# Altium PCB Unknown WaterSensor.PcbDoc
Units mm, origin at the board's own origin, x right, y up, seen from the top; angles counter-clockwise.
Board outline 56.1 x 56.1 mm, 2 copper layers (Top Layer, Bottom Layer), stack 1.071 mm thick; 44 components, 33 nets, 146 pads, 184 vias.
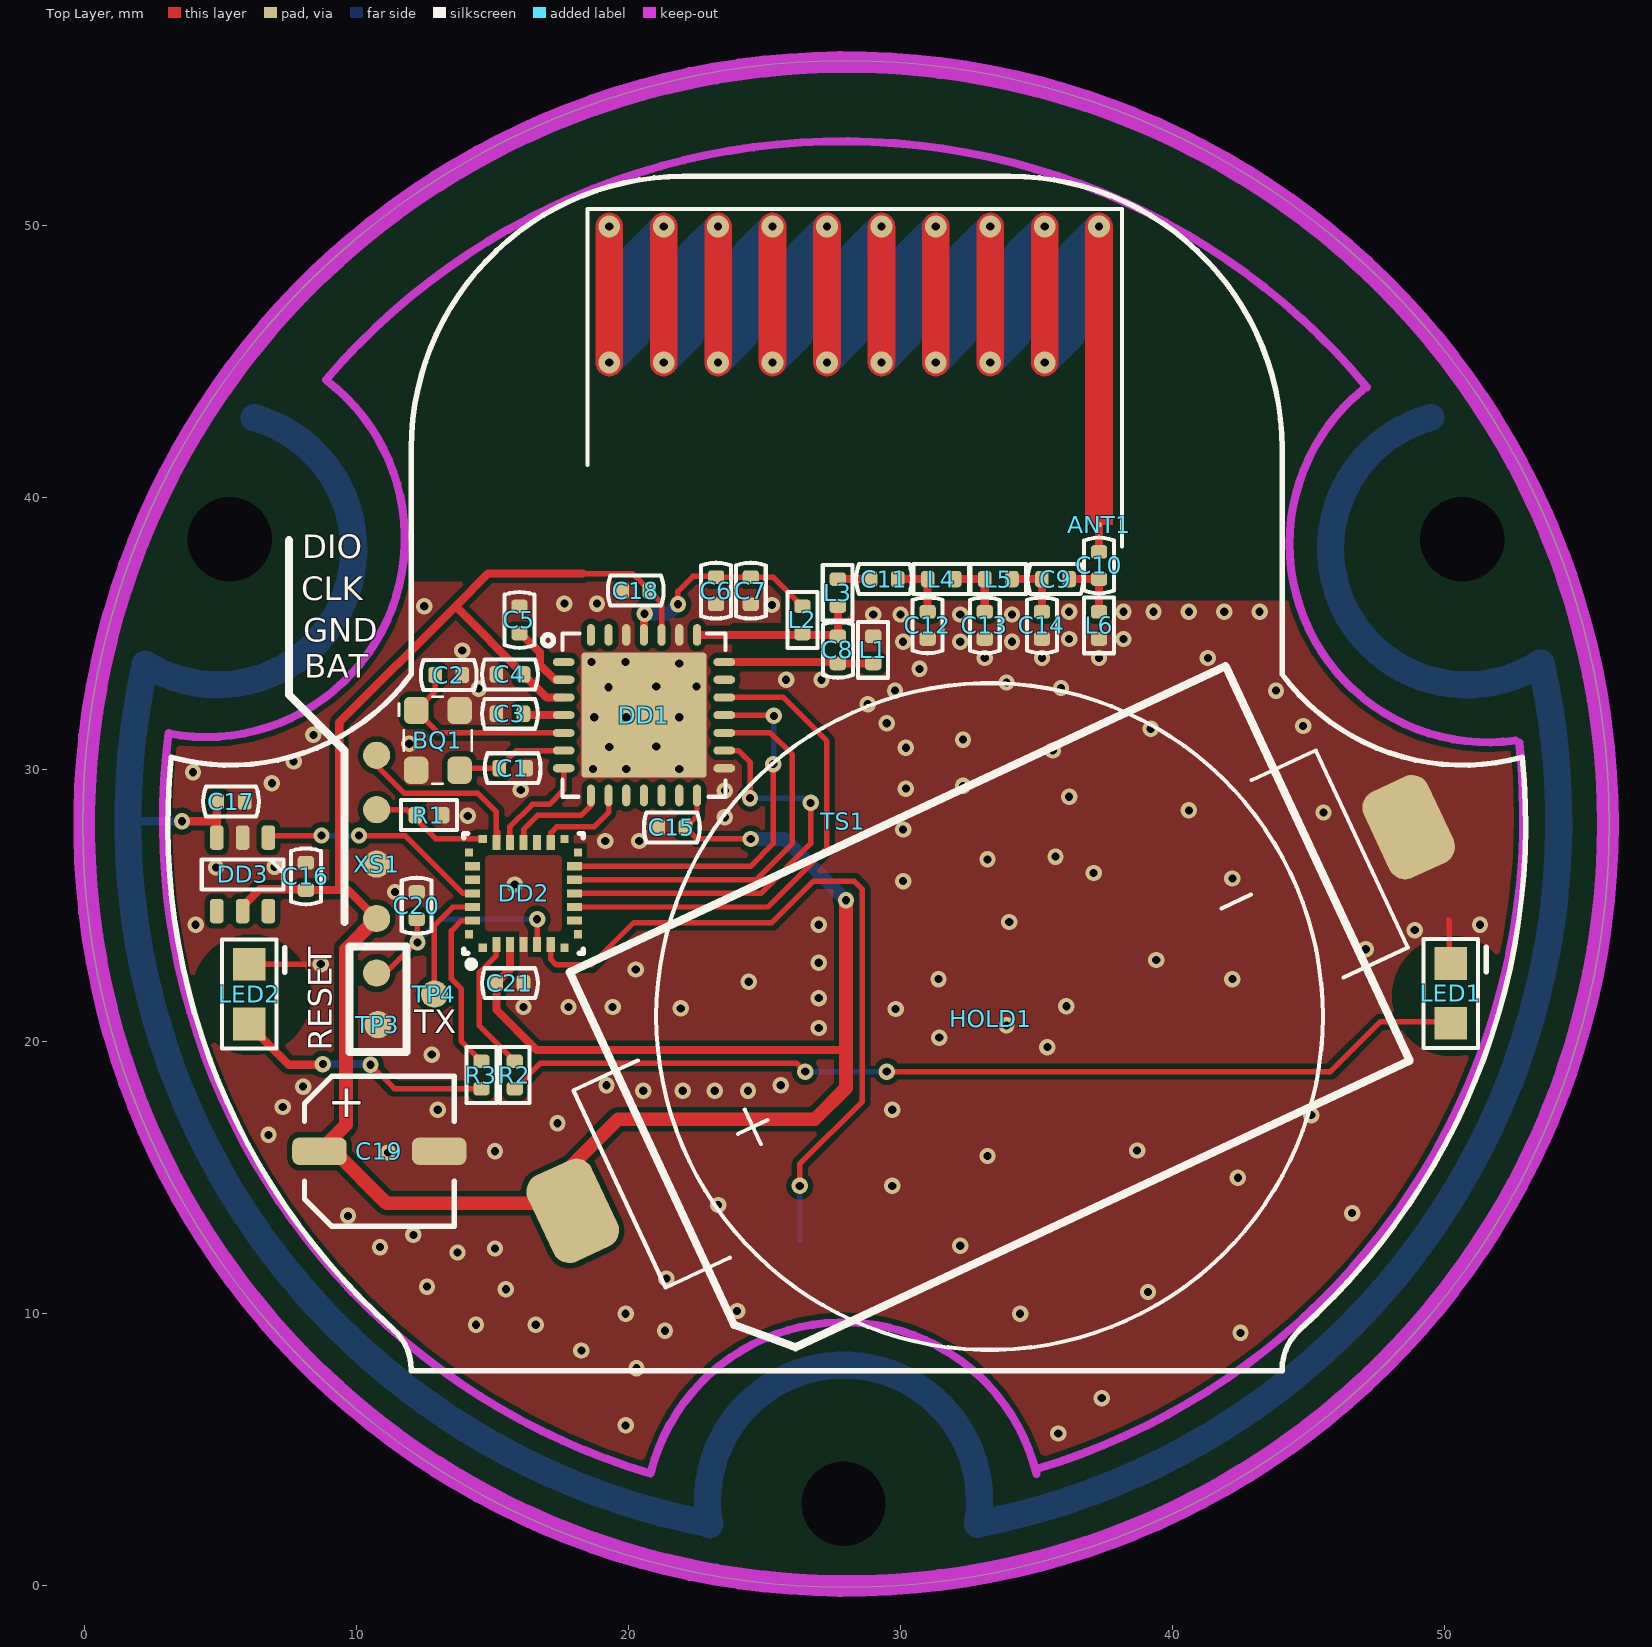
[diagram p0: Top Layer view]
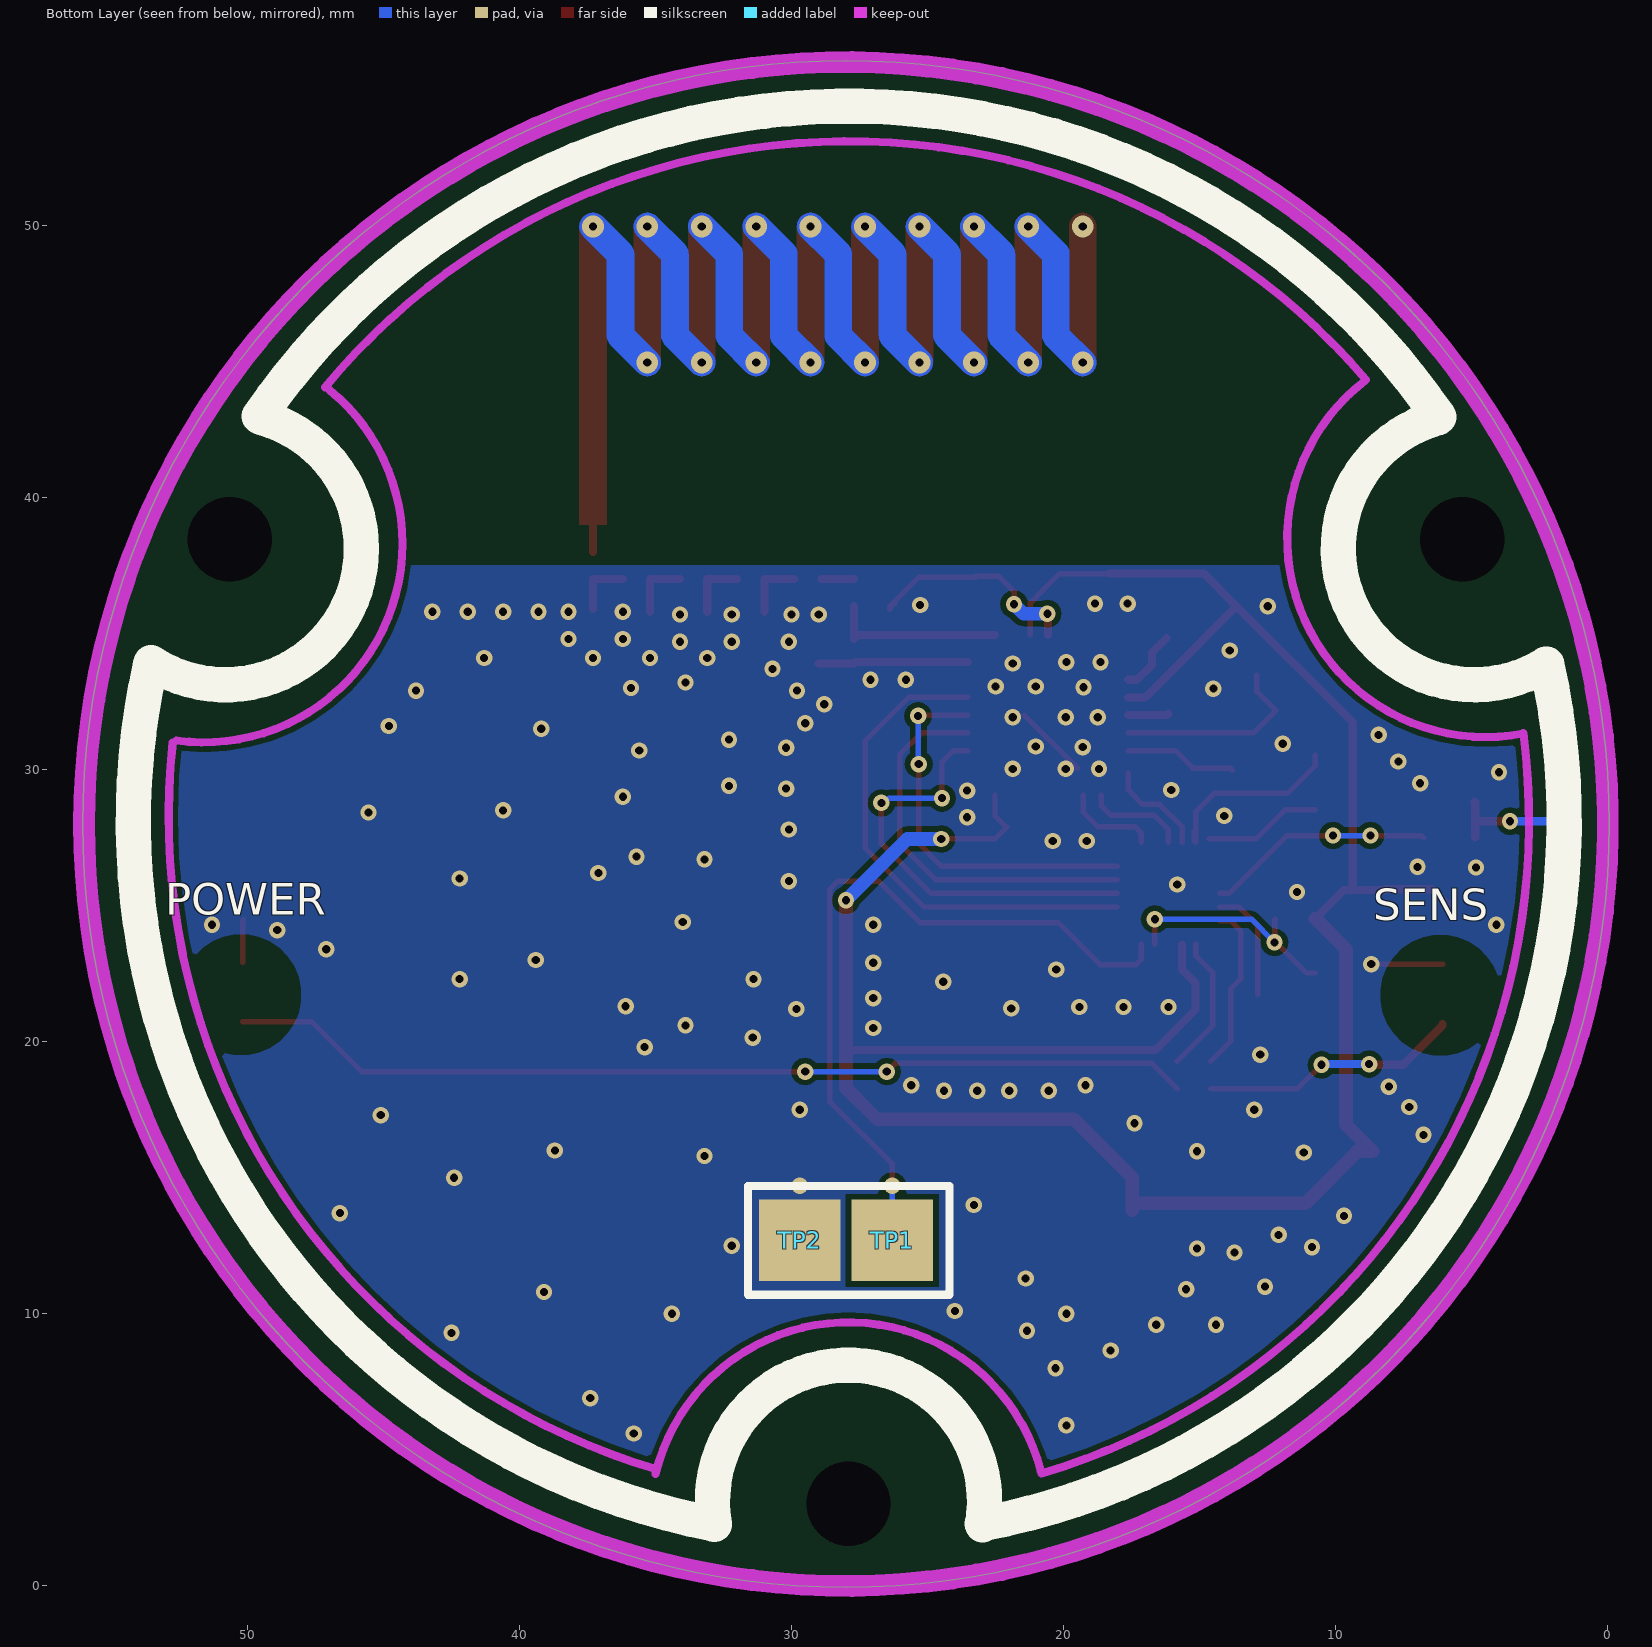
[diagram p1: Bottom Layer view, seen from below]
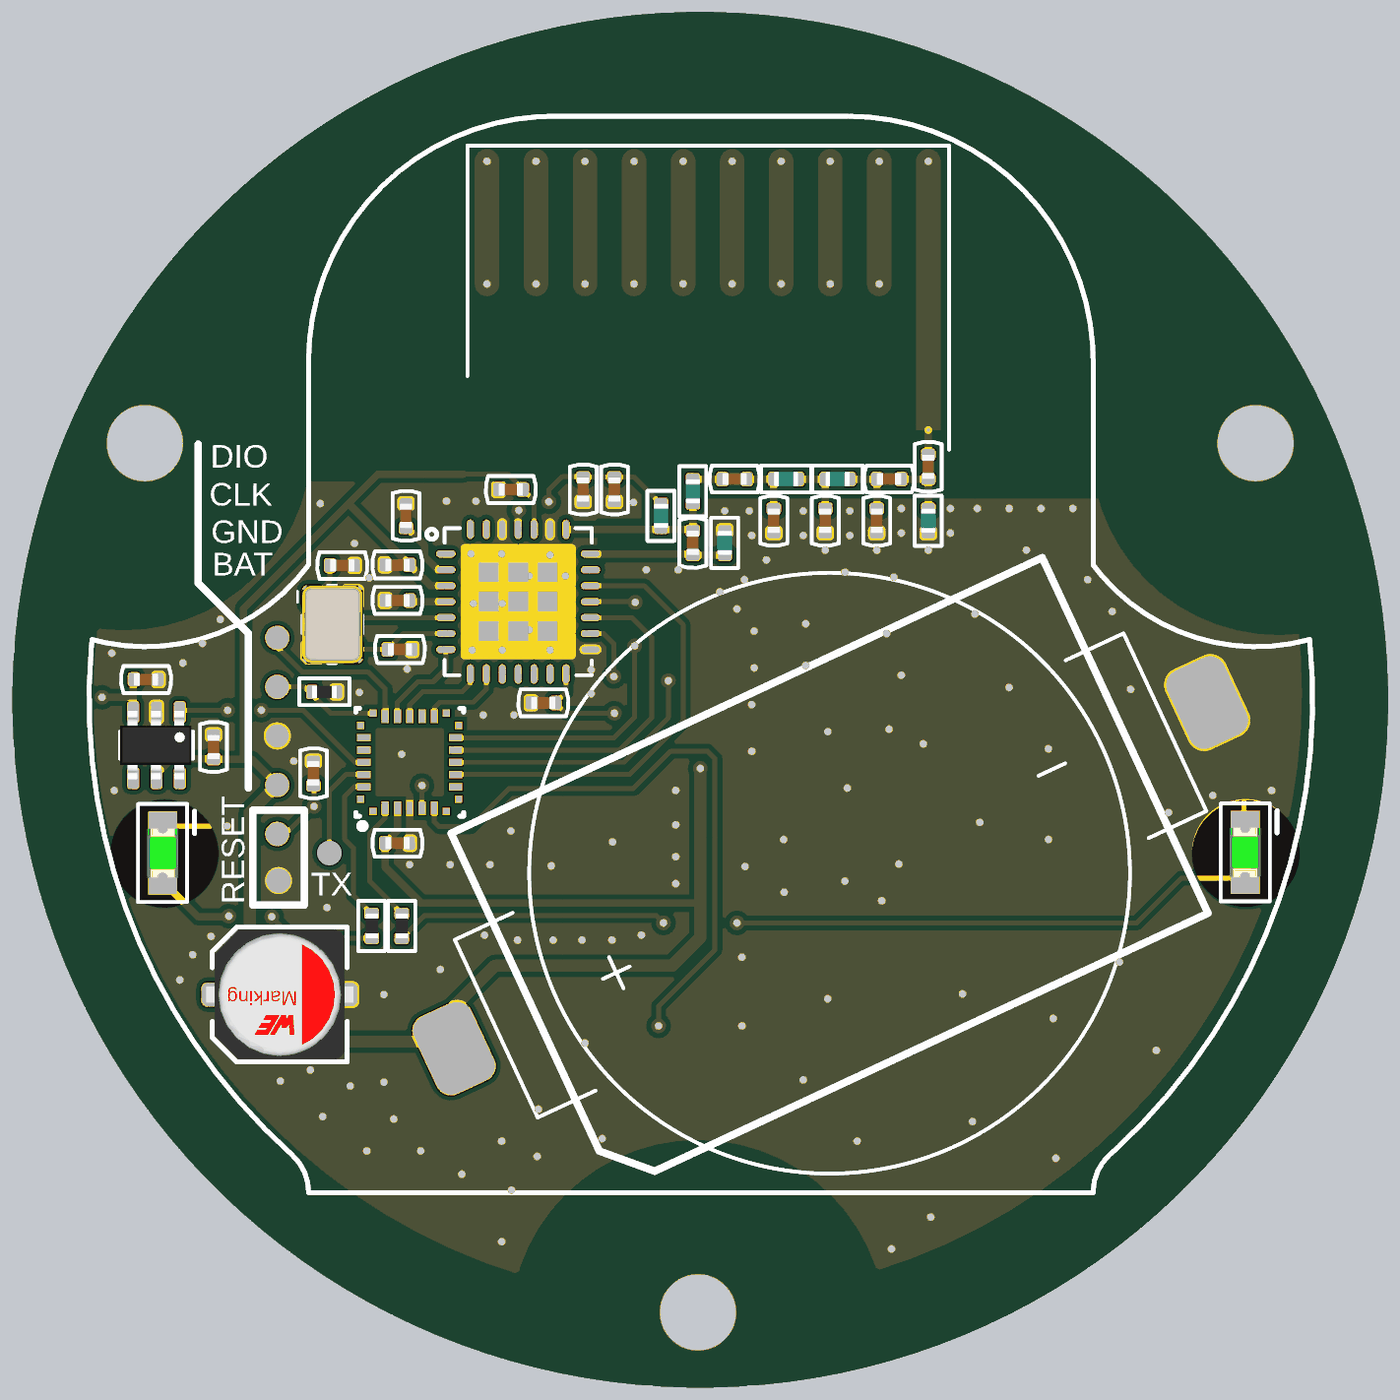
[diagram p2: 3D render of the assembled board from above, using the file's embedded part models]

## Layer stack, top to bottom
Top Solder, Top Mask: solder mask 0.0102, Solder Resist, Dk 3.5
Top Layer: signal copper 0.0356
Dielectric 1: core 1, FR-4, Dk 4.2
Bottom Layer: signal copper 0.0356
Bottom Solder 1: solder mask 0.0102, Solder Resist, Dk 3.5

## Board outline
28,-0.05 cw(c28,28) -0.05,28 cw(c28,28) 28,56.05 cw(c28,28) 56.05,28 cw(c28,28)

## Design rules (kind name [scope] priority, off if disabled: settings)
Clearance [All] p1: gap=0.2 ignorepadtopadclearanceinfootprint=FALSE
Height [All] p1 off: minheight=0 maxheight=25.4 prefheight=12.7
HoleSize [All] p1: absolutevalues=TRUE maxlimit=5 minlimit=0.25 maxpercent=80.000 minpercent=20.000
MinimumSolderMaskSliver [All] p1: minsoldermaskwidth=0.005
PasteMaskExpansion [All] p1: expansion=-0.025
PlaneClearance [All] p1: clearance=0.2
PlaneConnect [All] p1: planeconnectstyle=Direct reliefexpansion=0.508 reliefentries=4 reliefconductorwidth=0.254 reliefairgap=0.254
PolygonConnect [All] p1: connectstyle=Direct reliefconductorwidth=0.254 reliefentries=4 polygonreliefangle="90 Angle" airgapwidth=0.254
RoomDefinition WaterSensor_V2 [InComponentClass('WaterSensor_V2')] p1: confinementstyle=ConfineIn formatcopy=TRUE lockcomponents=FALSE outline -88,-202.3 -37.2,-202.3 -37.2,-176.9 -88,-176.9
RoutingVias [All] p1: holewidth=0.25 width=0.6 viastyle="Through Hole" minholewidth=0.25 minwidth=0.6 maxholewidth=1 maxwidth=1
SilkToSilkClearance [All] p1: silktosilkclearance=0.1
SilkToSolderMaskClearance [IsPad] p1: minsilkscreentomaskgap=0.1 clearancetoexposedcopper=TRUE
SolderMaskExpansion [All] p1: expansion=0.055 istentingtop=FALSE
Width [All] p1: maxlimit=5 minlimit=0.2 preferedwidth=0.2
22 further rules are at their usual default settings.

## Components (designator, comment, footprint, x,y, rotation, side; value= is the part's Value field where it differs from the comment)
ANT1 "Miniature Helical PCB Antenna for 868 MHz" ANTENNA868_915MHZ_A2N 28.3,44 r180 top locked
BQ1 "TSX-3225 32.0000MF10Z-W6" 3225 13,31.075 r270 top
C1 "C0402, 18pF, C0G" C0402 15.75,30.05 r0 top
C2 "C0402, 18pF, C0G" C0402 13.4,33.475 r0 top
C3 "C0402, 100nF,  16V, X7R" C0402 15.65,32.05 r0 top
C4 "C0402, 100nF,  16V, X7R" C0402 15.65,33.5 r180 top
C5 "C0402, 100nF,  16V, X7R" C0402 16,35.5 r90 top
C6 "C0402, 47pF, C0G" C0402 23.225,36.575 r90 top
C7 "C0402, 10nF, X7R" C0402 24.5,36.575 r90 top
C8 "C0402, 1.5pF, C0G" C0402 27.7,34.4 r90 top
C9 "C0402, 100pF,  50V" C0402 35.7,37 r0 top
C10 "C0402, 10pF,  50V" C0402 37.3,37.5 r90 top
C11 "C0402, 33pF, C0G" C0402 29.4,37 r0 top
C12 "C0402, 4.7pF, C0G_NM" C0402 31,35.3 r90 top
C13 "C0402, 4.7pF, C0G_NM" C0402 33.1,35.3 r90 top
C14 "C0402, 1.8pF, C0G_NM" C0402 35.2,35.3 r90 top
C15 "C0402, 100nF,  16V, X7R" C0402 21.6,27.875 r180 top
C16 "C0402, 100nF,  16V, X7R" C0402 8.15,26.075 r90 top
C17 "C0402, 27pF, C0G" C0402 5.4,28.825 r180 top
C18 "C0402, 100nF,  16V, X7R" C0402 20.275,36.575 r180 top
C19 "865080142007" WCAP-ASLI_5x5.5 10.85,15.975 r180 top
C20 "C0402, 100nF,  16V, X7R" C0402 12.225,25 r90 top
C21 "C0402, 100nF,  16V, X7R" C0402 15.65,22.15 r0 top
DD1 "SX1276IMLTRT" VQFN28_6X6MM 20.575,32 r0 top
DD2 "STM32G031G6U6" UFQFPN-28 16.15,25.45 r90 top
DD3 "TTP223" SOT23-6 5.825,26.15 r270 top
HOLD1 "BT-M-G0-R-CR2477A" SMTU2477N-LF 33.275,20.925 r25 top
L1 "LQG15HS5N6C02D" L0402 29,34.4 r90 top
L2 "LQW15AN33NJ00D" L0402 26.4,35.5 r90 top
L3 "LQG15HS10NJ02D" L0402 27.7,36.5 r90 top
L4 "LQG15HS8N2J02D" L0402 31.5,37 r0 top
L5 "LQG15HS7N5J02D" L0402 33.6,37 r0 top
L6 "LQG15HN5N1S02D_NM" L0402 37.3,35.3 r90 top
LED1 "FYLS-0805UGC" LED_0805_G 50.225,21.775 r270 top
LED2 "FYLS-0805UGC" LED_0805_G 6.075,21.75 r270 top
R1 "R0402, 10k 1%" R0402 12.675,28.325 r0 top
R2 "R0402, 330R 5%" R0402 15.825,18.775 r90 top
R3 "R0402, 330R 5%" R0402 14.6,18.775 r90 top
TP1 "Test Point 1mm pad" "Test Point 1mm"#1 26.3,12.7 r180 bottom
TP2 "Test Point 1mm pad" "Test Point 1mm"#1 29.7,12.7 r180 bottom
TP3 "Test Point 1mm pad" "Test Point 1mm"#2 10.8,20.625 r0 top
TP4 "Test Point 1mm pad" "Test Point 1mm"#2 12.875,21.75 r0 top
TS1 "Ring 4mm" "RING 4MM" 27.9,28.1 r0 top locked
XS1 "pad for programming" "pad for programming 5x2mm" 10.75,26.525 r0 top

## Footprints (in the part's own frame and the unit in brackets; to place one, negate y for a bottom-side part, rotate by r counter-clockwise, add the part's x,y. Pads: shape width x height; smd on the part's side, far side on the other; paste and mask are expansions set on the pad)
3225 [mm]
  rrect50% 1x0.9 smd: 1(-1.1,-0.8) 2(1.1,-0.8) 3(1.1,0.8) 4(-1.1,0.8)
  silkscreen extent -1.6,-1.43 1.6,1.25, body extent -1.6,-1.25 1.6,1.25, height 0.6
ANTENNA868_915MHZ_A2N [mm] "ANTENNA868_915MHZ_A2N"
  round 0.2 smd: 1(-9,5)
  Top Layer region: -6.501,-0.961 -6.501,-5.96 -6.501,-5.96 -6.503,-6.004 -6.509,-6.047 -6.518,-6.089 -6.531,-6.131 -6.548,-6.171 -6.568,-6.21 -6.592,-6.247 -6.619,-6.281 -6.648,-6.313 -6.68,-6.343 -6.715,-6.369 -6.752,-6.393 -6.791,-6.413 -6.831,-6.429 -6.873,-6.442 -6.915,-6.452 -6.958,-6.457 -7.002,-6.459 -7.046,-6.457 -7.089,-6.451 -7.131,-6.442 -7.173,-6.429 -7.213,-6.412 -7.252,-6.392 -7.289,-6.368 -7.323,-6.341 -7.355,-6.312 -7.385,-6.28 -7.411,-6.245 -7.435,-6.208 -7.455,-6.169 -7.471,-6.129 -7.484,-6.087 -7.494,-6.045 -7.499,-6.002 -7.501,-5.96 -7.501,-0.961 -7.501,-0.961 -7.499,-0.917 -7.493,-0.874 -7.484,-0.832 -7.471,-0.79 -7.454,-0.75 -7.434,-0.711 -7.411,-0.674 -7.384,-0.64 -7.355,-0.607 -7.322,-0.578 -7.288,-0.551 -7.251,-0.528 -7.212,-0.508 -7.172,-0.491 -7.13,-0.478 -7.088,-0.469 -7.045,-0.463 -7.001,-0.461 -6.957,-0.463 -6.914,-0.469 -6.872,-0.478 -6.83,-0.491 -6.79,-0.508 -6.751,-0.528 -6.714,-0.551 -6.68,-0.578 -6.647,-0.607 -6.618,-0.64 -6.591,-0.674 -6.568,-0.711 -6.548,-0.75 -6.531,-0.79 -6.518,-0.832 -6.509,-0.874 -6.503,-0.917 -6.501,-0.961
  Top Layer region: -4.502,-0.961 -4.502,-5.96 -4.502,-5.96 -4.504,-6.004 -4.51,-6.047 -4.519,-6.089 -4.532,-6.131 -4.549,-6.171 -4.569,-6.21 -4.593,-6.247 -4.62,-6.281 -4.649,-6.313 -4.681,-6.343 -4.716,-6.369 -4.753,-6.393 -4.792,-6.413 -4.832,-6.429 -4.874,-6.442 -4.916,-6.452 -4.959,-6.457 -5.003,-6.459 -5.047,-6.457 -5.09,-6.451 -5.132,-6.442 -5.174,-6.429 -5.214,-6.412 -5.253,-6.392 -5.29,-6.368 -5.324,-6.341 -5.356,-6.312 -5.386,-6.28 -5.412,-6.245 -5.436,-6.208 -5.456,-6.169 -5.472,-6.129 -5.485,-6.087 -5.495,-6.045 -5.5,-6.002 -5.502,-5.96 -5.502,-0.961 -5.502,-0.961 -5.5,-0.917 -5.494,-0.874 -5.485,-0.832 -5.472,-0.79 -5.455,-0.75 -5.435,-0.711 -5.412,-0.674 -5.385,-0.64 -5.356,-0.607 -5.323,-0.578 -5.289,-0.551 -5.252,-0.528 -5.213,-0.508 -5.173,-0.491 -5.131,-0.478 -5.089,-0.469 -5.046,-0.463 -5.002,-0.461 -4.958,-0.463 -4.915,-0.469 -4.873,-0.478 -4.831,-0.491 -4.791,-0.508 -4.752,-0.528 -4.715,-0.551 -4.681,-0.578 -4.648,-0.607 -4.619,-0.64 -4.592,-0.674 -4.569,-0.711 -4.549,-0.75 -4.532,-0.79 -4.519,-0.832 -4.51,-0.874 -4.504,-0.917 -4.502,-0.961
  Top Layer region: -2.5,-0.961 -2.5,-5.96 -2.5,-5.96 -2.502,-6.004 -2.508,-6.047 -2.517,-6.089 -2.53,-6.131 -2.547,-6.171 -2.567,-6.21 -2.59,-6.247 -2.617,-6.281 -2.646,-6.314 -2.679,-6.343 -2.713,-6.37 -2.75,-6.393 -2.789,-6.413 -2.829,-6.43 -2.871,-6.443 -2.913,-6.452 -2.956,-6.458 -3,-6.46 -3.044,-6.458 -3.087,-6.452 -3.129,-6.443 -3.171,-6.43 -3.211,-6.413 -3.25,-6.393 -3.287,-6.37 -3.321,-6.343 -3.354,-6.314 -3.383,-6.281 -3.41,-6.247 -3.433,-6.21 -3.453,-6.171 -3.47,-6.131 -3.483,-6.089 -3.492,-6.047 -3.498,-6.004 -3.5,-5.96 -3.5,-0.961 -3.5,-0.961 -3.498,-0.917 -3.492,-0.874 -3.483,-0.832 -3.47,-0.79 -3.453,-0.75 -3.433,-0.711 -3.41,-0.674 -3.383,-0.64 -3.354,-0.607 -3.321,-0.578 -3.287,-0.551 -3.25,-0.528 -3.211,-0.508 -3.171,-0.491 -3.129,-0.478 -3.087,-0.469 -3.044,-0.463 -3,-0.461 -2.956,-0.463 -2.913,-0.469 -2.871,-0.478 -2.829,-0.491 -2.789,-0.508 -2.75,-0.528 -2.713,-0.551 -2.679,-0.578 -2.646,-0.607 -2.617,-0.64 -2.59,-0.674 -2.567,-0.711 -2.547,-0.75 -2.53,-0.79 -2.517,-0.832 -2.508,-0.874 -2.502,-0.917 -2.5,-0.961
  Top Layer region: -0.502,-0.961 -0.502,-5.96 -0.502,-5.96 -0.504,-6.004 -0.51,-6.047 -0.519,-6.089 -0.532,-6.131 -0.549,-6.171 -0.569,-6.21 -0.592,-6.247 -0.619,-6.281 -0.648,-6.314 -0.681,-6.343 -0.715,-6.37 -0.752,-6.393 -0.791,-6.413 -0.831,-6.43 -0.873,-6.443 -0.915,-6.452 -0.958,-6.458 -1.002,-6.46 -1.046,-6.458 -1.089,-6.452 -1.131,-6.443 -1.173,-6.43 -1.213,-6.413 -1.252,-6.393 -1.289,-6.37 -1.323,-6.343 -1.356,-6.314 -1.385,-6.281 -1.412,-6.247 -1.435,-6.21 -1.455,-6.171 -1.472,-6.131 -1.485,-6.089 -1.494,-6.047 -1.5,-6.004 -1.502,-5.96 -1.502,-0.961 -1.502,-0.961 -1.5,-0.917 -1.494,-0.874 -1.485,-0.832 -1.472,-0.79 -1.455,-0.75 -1.435,-0.711 -1.412,-0.674 -1.385,-0.64 -1.356,-0.607 -1.323,-0.578 -1.289,-0.551 -1.252,-0.528 -1.213,-0.508 -1.173,-0.491 -1.131,-0.478 -1.089,-0.469 -1.046,-0.463 -1.002,-0.461 -0.958,-0.463 -0.915,-0.469 -0.873,-0.478 -0.831,-0.491 -0.791,-0.508 -0.752,-0.528 -0.715,-0.551 -0.681,-0.578 -0.648,-0.607 -0.619,-0.64 -0.592,-0.674 -0.569,-0.711 -0.549,-0.75 -0.532,-0.79 -0.519,-0.832 -0.51,-0.874 -0.504,-0.917 -0.502,-0.961
  Top Layer region: 1.497,-0.961 1.497,-5.96 1.497,-5.96 1.495,-6.004 1.489,-6.047 1.48,-6.089 1.467,-6.131 1.45,-6.171 1.43,-6.21 1.407,-6.247 1.38,-6.281 1.351,-6.314 1.318,-6.343 1.284,-6.37 1.247,-6.393 1.208,-6.413 1.168,-6.43 1.126,-6.443 1.084,-6.452 1.041,-6.458 0.997,-6.46 0.953,-6.458 0.91,-6.452 0.868,-6.443 0.826,-6.43 0.786,-6.413 0.747,-6.393 0.71,-6.37 0.676,-6.343 0.643,-6.314 0.614,-6.281 0.587,-6.247 0.564,-6.21 0.544,-6.171 0.527,-6.131 0.514,-6.089 0.505,-6.047 0.499,-6.004 0.497,-5.96 0.497,-0.961 0.497,-0.961 0.499,-0.917 0.505,-0.874 0.514,-0.832 0.527,-0.79 0.544,-0.75 0.564,-0.711 0.587,-0.674 0.614,-0.64 0.643,-0.607 0.676,-0.578 0.71,-0.551 0.747,-0.528 0.786,-0.508 0.826,-0.491 0.868,-0.478 0.91,-0.469 0.953,-0.463 0.997,-0.461 1.041,-0.463 1.084,-0.469 1.126,-0.478 1.168,-0.491 1.208,-0.508 1.247,-0.528 1.284,-0.551 1.318,-0.578 1.351,-0.607 1.38,-0.64 1.407,-0.674 1.43,-0.711 1.45,-0.75 1.467,-0.79 1.48,-0.832 1.489,-0.874 1.495,-0.917 1.497,-0.961
  Top Layer region: 3.499,-0.961 3.499,-5.96 3.499,-5.96 3.497,-6.004 3.491,-6.047 3.482,-6.089 3.469,-6.131 3.452,-6.171 3.432,-6.21 3.409,-6.247 3.382,-6.281 3.353,-6.314 3.32,-6.343 3.286,-6.37 3.249,-6.393 3.21,-6.413 3.17,-6.43 3.128,-6.443 3.086,-6.452 3.043,-6.458 2.999,-6.46 2.955,-6.458 2.912,-6.452 2.87,-6.443 2.828,-6.43 2.788,-6.413 2.749,-6.393 2.712,-6.37 2.678,-6.343 2.645,-6.314 2.616,-6.281 2.589,-6.247 2.566,-6.21 2.546,-6.171 2.529,-6.131 2.516,-6.089 2.507,-6.047 2.501,-6.004 2.499,-5.96 2.499,-0.961 2.499,-0.961 2.501,-0.917 2.507,-0.874 2.516,-0.832 2.529,-0.79 2.546,-0.75 2.566,-0.711 2.589,-0.674 2.616,-0.64 2.645,-0.607 2.678,-0.578 2.712,-0.551 2.749,-0.528 2.788,-0.508 2.828,-0.491 2.87,-0.478 2.912,-0.469 2.955,-0.463 2.999,-0.461 3.043,-0.463 3.086,-0.469 3.128,-0.478 3.17,-0.491 3.21,-0.508 3.249,-0.528 3.286,-0.551 3.32,-0.578 3.353,-0.607 3.382,-0.64 3.409,-0.674 3.432,-0.711 3.452,-0.75 3.469,-0.79 3.482,-0.832 3.491,-0.874 3.497,-0.917 3.499,-0.961
  Top Layer region: 5.498,-0.961 5.498,-5.96 5.498,-5.96 5.496,-6.004 5.49,-6.047 5.481,-6.089 5.468,-6.131 5.451,-6.171 5.431,-6.21 5.408,-6.247 5.381,-6.281 5.352,-6.314 5.319,-6.343 5.285,-6.37 5.248,-6.393 5.209,-6.413 5.169,-6.43 5.127,-6.443 5.085,-6.452 5.042,-6.458 4.998,-6.46 4.954,-6.458 4.911,-6.452 4.869,-6.443 4.827,-6.43 4.787,-6.413 4.748,-6.393 4.711,-6.37 4.677,-6.343 4.644,-6.314 4.615,-6.281 4.588,-6.247 4.565,-6.21 4.545,-6.171 4.528,-6.131 4.515,-6.089 4.506,-6.047 4.5,-6.004 4.498,-5.96 4.498,-0.961 4.498,-0.961 4.5,-0.917 4.506,-0.874 4.515,-0.832 4.528,-0.79 4.545,-0.75 4.565,-0.711 4.588,-0.674 4.615,-0.64 4.644,-0.607 4.677,-0.578 4.711,-0.551 4.748,-0.528 4.787,-0.508 4.827,-0.491 4.869,-0.478 4.911,-0.469 4.954,-0.463 4.998,-0.461 5.042,-0.463 5.085,-0.469 5.127,-0.478 5.169,-0.491 5.209,-0.508 5.248,-0.528 5.285,-0.551 5.319,-0.578 5.352,-0.607 5.381,-0.64 5.408,-0.674 5.431,-0.711 5.451,-0.75 5.468,-0.79 5.481,-0.832 5.49,-0.874 5.496,-0.917 5.498,-0.961
  Top Layer region: 9.498,-0.961 9.498,-5.96 9.498,-5.96 9.496,-6.004 9.49,-6.047 9.481,-6.089 9.468,-6.131 9.451,-6.171 9.431,-6.21 9.408,-6.247 9.381,-6.281 9.352,-6.314 9.319,-6.343 9.285,-6.37 9.248,-6.393 9.209,-6.413 9.169,-6.43 9.127,-6.443 9.085,-6.452 9.042,-6.458 8.998,-6.46 8.954,-6.458 8.911,-6.452 8.869,-6.443 8.827,-6.43 8.787,-6.413 8.748,-6.393 8.711,-6.37 8.677,-6.343 8.644,-6.314 8.615,-6.281 8.588,-6.247 8.565,-6.21 8.545,-6.171 8.528,-6.131 8.515,-6.089 8.506,-6.047 8.5,-6.004 8.498,-5.96 8.498,-0.961 8.498,-0.961 8.5,-0.917 8.506,-0.874 8.515,-0.832 8.528,-0.79 8.545,-0.75 8.565,-0.711 8.588,-0.674 8.615,-0.64 8.644,-0.607 8.677,-0.578 8.711,-0.551 8.748,-0.528 8.787,-0.508 8.827,-0.491 8.869,-0.478 8.911,-0.469 8.954,-0.463 8.998,-0.461 9.042,-0.463 9.085,-0.469 9.127,-0.478 9.169,-0.491 9.209,-0.508 9.248,-0.528 9.285,-0.551 9.319,-0.578 9.352,-0.607 9.381,-0.64 9.408,-0.674 9.431,-0.711 9.451,-0.75 9.468,-0.79 9.481,-0.832 9.49,-0.874 9.496,-0.917 9.498,-0.961
  Top Layer region: 7.5,-0.961 7.5,-5.96 7.5,-5.96 7.498,-6.004 7.492,-6.047 7.483,-6.089 7.47,-6.131 7.453,-6.171 7.433,-6.21 7.41,-6.247 7.383,-6.281 7.354,-6.314 7.321,-6.343 7.287,-6.37 7.25,-6.393 7.211,-6.413 7.171,-6.43 7.129,-6.443 7.087,-6.452 7.044,-6.458 7,-6.46 6.956,-6.458 6.913,-6.452 6.871,-6.443 6.829,-6.43 6.789,-6.413 6.75,-6.393 6.713,-6.37 6.679,-6.343 6.646,-6.314 6.617,-6.281 6.59,-6.247 6.567,-6.21 6.547,-6.171 6.53,-6.131 6.517,-6.089 6.508,-6.047 6.502,-6.004 6.5,-5.96 6.5,-0.961 6.5,-0.961 6.502,-0.917 6.508,-0.874 6.517,-0.832 6.53,-0.79 6.547,-0.75 6.567,-0.711 6.59,-0.674 6.617,-0.64 6.646,-0.607 6.679,-0.578 6.713,-0.551 6.75,-0.528 6.789,-0.508 6.829,-0.491 6.871,-0.478 6.913,-0.469 6.956,-0.463 7,-0.461 7.044,-0.463 7.087,-0.469 7.129,-0.478 7.171,-0.491 7.211,-0.508 7.25,-0.528 7.287,-0.551 7.321,-0.578 7.354,-0.607 7.383,-0.64 7.41,-0.674 7.433,-0.711 7.453,-0.75 7.47,-0.79 7.483,-0.832 7.492,-0.874 7.498,-0.917 7.5,-0.961
  Top Layer region: -9.5,-5.96 -9.5,5 -8.5,5 -8.5,-5.96 -8.502,-6.004 -8.508,-6.047 -8.517,-6.089 -8.53,-6.131 -8.547,-6.171 -8.567,-6.21 -8.591,-6.247 -8.618,-6.281 -8.647,-6.313 -8.679,-6.343 -8.714,-6.369 -8.751,-6.393 -8.79,-6.413 -8.83,-6.429 -8.872,-6.442 -8.914,-6.452 -8.957,-6.457 -9.001,-6.459 -9.045,-6.457 -9.088,-6.451 -9.13,-6.442 -9.172,-6.429 -9.212,-6.412 -9.251,-6.392 -9.288,-6.368 -9.322,-6.341 -9.354,-6.312 -9.384,-6.28 -9.41,-6.245 -9.434,-6.208 -9.454,-6.169 -9.47,-6.129 -9.483,-6.087 -9.493,-6.045 -9.498,-6.002
  Bottom Layer region: -7.355,-5.606 -7.355,-5.606 -7.384,-5.639 -7.411,-5.673 -7.434,-5.71 -7.454,-5.749 -7.471,-5.789 -7.484,-5.831 -7.493,-5.873 -7.499,-5.916 -7.501,-5.96 -7.499,-6.004 -7.493,-6.047 -7.484,-6.089 -7.471,-6.131 -7.454,-6.171 -7.434,-6.21 -7.411,-6.247 -7.384,-6.281 -7.355,-6.314 -7.322,-6.343 -7.288,-6.37 -7.251,-6.393 -7.212,-6.413 -7.172,-6.43 -7.13,-6.443 -7.088,-6.452 -7.045,-6.458 -7.001,-6.46 -6.957,-6.458 -6.914,-6.452 -6.872,-6.443 -6.83,-6.43 -6.79,-6.413 -6.751,-6.393 -6.714,-6.37 -6.68,-6.343 -6.647,-6.314 -6.647,-6.313 -5.634,-5.3 -5.634,-5.3 -5.605,-5.268 -5.578,-5.233 -5.555,-5.196 -5.535,-5.158 -5.518,-5.117 -5.505,-5.076 -5.495,-5.033 -5.49,-4.99 -5.488,-4.946 -5.488,-4.946 -5.488,-2.153 -4.648,-1.314 -4.648,-1.314 -4.619,-1.282 -4.592,-1.247 -4.569,-1.21 -4.549,-1.172 -4.532,-1.131 -4.519,-1.09 -4.509,-1.047 -4.504,-1.004 -4.502,-0.96 -4.504,-0.917 -4.51,-0.873 -4.519,-0.831 -4.532,-0.789 -4.549,-0.749 -4.569,-0.71 -4.593,-0.674 -4.619,-0.639 -4.649,-0.607 -4.681,-0.578 -4.716,-0.551 -4.753,-0.528 -4.791,-0.508 -4.832,-0.491 -4.873,-0.478 -4.916,-0.468 -4.959,-0.463 -5.003,-0.461 -5.046,-0.463 -5.09,-0.469 -5.132,-0.478 -5.174,-0.491 -5.214,-0.508 -5.253,-0.528 -5.289,-0.552 -5.324,-0.578 -5.356,-0.607 -6.341,-1.593 -6.341,-1.593 -6.371,-1.625 -6.397,-1.66 -6.421,-1.696 -6.441,-1.735 -6.458,-1.775 -6.471,-1.817 -6.48,-1.859 -6.486,-1.903 -6.488,-1.946 -6.488,-4.739 -7.355,-5.606
  Bottom Layer region: -5.356,-5.606 -5.356,-5.606 -5.385,-5.639 -5.412,-5.673 -5.435,-5.71 -5.455,-5.749 -5.472,-5.789 -5.485,-5.831 -5.494,-5.873 -5.5,-5.916 -5.502,-5.96 -5.5,-6.004 -5.494,-6.047 -5.485,-6.089 -5.472,-6.131 -5.455,-6.171 -5.435,-6.21 -5.412,-6.247 -5.385,-6.281 -5.356,-6.314 -5.323,-6.343 -5.289,-6.37 -5.252,-6.393 -5.213,-6.413 -5.173,-6.43 -5.131,-6.443 -5.089,-6.452 -5.046,-6.458 -5.002,-6.46 -4.958,-6.458 -4.915,-6.452 -4.873,-6.443 -4.831,-6.43 -4.791,-6.413 -4.752,-6.393 -4.715,-6.37 -4.681,-6.343 -4.648,-6.314 -4.648,-6.313 -3.635,-5.3 -3.635,-5.3 -3.606,-5.268 -3.579,-5.233 -3.556,-5.196 -3.536,-5.158 -3.519,-5.117 -3.506,-5.076 -3.496,-5.033 -3.491,-4.99 -3.489,-4.946 -3.489,-4.946 -3.489,-2.153 -2.65,-1.314 -2.65,-1.314 -2.62,-1.282 -2.594,-1.247 -2.57,-1.211 -2.55,-1.172 -2.533,-1.132 -2.52,-1.09 -2.511,-1.048 -2.505,-1.004 -2.503,-0.961 -2.505,-0.917 -2.51,-0.874 -2.52,-0.831 -2.533,-0.79 -2.55,-0.749 -2.57,-0.711 -2.593,-0.674 -2.62,-0.639 -2.649,-0.607 -2.681,-0.577 -2.716,-0.551 -2.752,-0.527 -2.791,-0.507 -2.831,-0.49 -2.873,-0.477 -2.915,-0.468 -2.959,-0.462 -3.002,-0.46 -3.046,-0.462 -3.089,-0.467 -3.132,-0.477 -3.173,-0.49 -3.214,-0.507 -3.252,-0.527 -3.289,-0.55 -3.324,-0.577 -3.356,-0.606 -3.357,-0.607 -4.342,-1.593 -4.342,-1.593 -4.372,-1.625 -4.398,-1.66 -4.422,-1.696 -4.442,-1.735 -4.459,-1.775 -4.472,-1.817 -4.481,-1.859 -4.487,-1.903 -4.489,-1.946 -4.489,-4.739 -5.356,-5.606
  Bottom Layer region: -3.354,-5.606 -3.354,-5.606 -3.383,-5.638 -3.41,-5.673 -3.433,-5.71 -3.453,-5.748 -3.47,-5.789 -3.483,-5.83 -3.493,-5.873 -3.498,-5.916 -3.5,-5.96 -3.498,-6.003 -3.492,-6.047 -3.483,-6.089 -3.47,-6.131 -3.453,-6.171 -3.433,-6.21 -3.409,-6.246 -3.383,-6.281 -3.353,-6.313 -3.321,-6.342 -3.286,-6.369 -3.249,-6.392 -3.211,-6.412 -3.17,-6.429 -3.129,-6.442 -3.086,-6.452 -3.043,-6.457 -2.999,-6.459 -2.956,-6.457 -2.912,-6.451 -2.87,-6.442 -2.828,-6.429 -2.788,-6.412 -2.749,-6.392 -2.713,-6.368 -2.678,-6.342 -2.647,-6.313 -1.634,-5.3 -1.634,-5.3 -1.604,-5.268 -1.578,-5.233 -1.554,-5.197 -1.534,-5.158 -1.517,-5.118 -1.504,-5.076 -1.495,-5.034 -1.489,-4.99 -1.487,-4.947 -1.487,-4.946 -1.487,-2.153 -0.648,-1.314 -0.648,-1.314 -0.619,-1.282 -0.592,-1.247 -0.569,-1.21 -0.549,-1.172 -0.532,-1.131 -0.519,-1.09 -0.509,-1.047 -0.504,-1.004 -0.502,-0.96 -0.504,-0.917 -0.51,-0.873 -0.519,-0.831 -0.532,-0.789 -0.549,-0.749 -0.569,-0.71 -0.593,-0.674 -0.619,-0.639 -0.649,-0.607 -0.681,-0.578 -0.716,-0.551 -0.753,-0.528 -0.791,-0.508 -0.832,-0.491 -0.873,-0.478 -0.916,-0.468 -0.959,-0.463 -1.003,-0.461 -1.046,-0.463 -1.09,-0.469 -1.132,-0.478 -1.174,-0.491 -1.214,-0.508 -1.253,-0.528 -1.289,-0.552 -1.324,-0.578 -1.355,-0.607 -2.341,-1.593 -2.341,-1.593 -2.37,-1.625 -2.397,-1.66 -2.42,-1.697 -2.44,-1.735 -2.457,-1.776 -2.47,-1.817 -2.48,-1.86 -2.485,-1.903 -2.487,-1.946 -2.487,-4.739 -3.354,-5.606
  Bottom Layer region: -1.355,-5.606 -1.355,-5.606 -1.384,-5.639 -1.411,-5.673 -1.434,-5.71 -1.454,-5.749 -1.471,-5.789 -1.484,-5.831 -1.493,-5.873 -1.499,-5.916 -1.501,-5.96 -1.499,-6.004 -1.493,-6.047 -1.484,-6.089 -1.471,-6.131 -1.454,-6.171 -1.434,-6.21 -1.411,-6.247 -1.384,-6.281 -1.355,-6.314 -1.322,-6.343 -1.288,-6.37 -1.251,-6.393 -1.212,-6.413 -1.172,-6.43 -1.13,-6.443 -1.088,-6.452 -1.045,-6.458 -1.001,-6.46 -0.957,-6.458 -0.914,-6.452 -0.872,-6.443 -0.83,-6.43 -0.79,-6.413 -0.751,-6.393 -0.714,-6.37 -0.68,-6.343 -0.648,-6.313 0.366,-5.3 0.366,-5.3 0.395,-5.268 0.422,-5.233 0.445,-5.196 0.465,-5.158 0.482,-5.117 0.495,-5.076 0.505,-5.033 0.51,-4.99 0.512,-4.946 0.512,-4.946 0.512,-2.153 1.351,-1.314 1.351,-1.314 1.38,-1.282 1.407,-1.247 1.43,-1.21 1.45,-1.172 1.467,-1.131 1.48,-1.09 1.49,-1.047 1.495,-1.004 1.497,-0.96 1.495,-0.917 1.489,-0.873 1.48,-0.831 1.467,-0.789 1.45,-0.749 1.43,-0.71 1.406,-0.674 1.38,-0.639 1.35,-0.607 1.318,-0.578 1.283,-0.551 1.246,-0.528 1.208,-0.508 1.167,-0.491 1.126,-0.478 1.083,-0.468 1.04,-0.463 0.996,-0.461 0.953,-0.463 0.909,-0.469 0.867,-0.478 0.825,-0.491 0.785,-0.508 0.746,-0.528 0.71,-0.552 0.675,-0.578 0.644,-0.607 -0.342,-1.593 -0.342,-1.593 -0.371,-1.625 -0.398,-1.66 -0.421,-1.697 -0.441,-1.735 -0.458,-1.776 -0.471,-1.817 -0.481,-1.86 -0.486,-1.903 -0.488,-1.946 -0.488,-4.739 -1.355,-5.606
  Bottom Layer region: 0.644,-5.606 0.644,-5.606 0.614,-5.638 0.588,-5.673 0.564,-5.709 0.544,-5.748 0.527,-5.788 0.514,-5.83 0.505,-5.872 0.499,-5.916 0.497,-5.959 0.499,-6.003 0.504,-6.046 0.514,-6.089 0.527,-6.13 0.544,-6.171 0.564,-6.209 0.587,-6.246 0.614,-6.281 0.643,-6.313 0.675,-6.343 0.71,-6.369 0.746,-6.393 0.785,-6.413 0.825,-6.43 0.867,-6.443 0.909,-6.452 0.953,-6.458 0.996,-6.46 1.04,-6.458 1.083,-6.453 1.126,-6.443 1.167,-6.43 1.208,-6.413 1.246,-6.393 1.283,-6.37 1.318,-6.343 1.35,-6.314 1.351,-6.313 2.364,-5.3 2.364,-5.3 2.394,-5.268 2.42,-5.233 2.444,-5.197 2.464,-5.158 2.481,-5.118 2.494,-5.076 2.503,-5.034 2.509,-4.99 2.511,-4.947 2.511,-4.946 2.511,-2.153 3.35,-1.314 3.35,-1.314 3.379,-1.282 3.406,-1.247 3.429,-1.21 3.449,-1.172 3.466,-1.131 3.479,-1.09 3.489,-1.047 3.494,-1.004 3.496,-0.96 3.494,-0.917 3.488,-0.873 3.479,-0.831 3.466,-0.789 3.449,-0.749 3.429,-0.71 3.405,-0.674 3.379,-0.639 3.349,-0.607 3.317,-0.578 3.282,-0.551 3.245,-0.528 3.207,-0.508 3.166,-0.491 3.125,-0.478 3.082,-0.468 3.039,-0.463 2.995,-0.461 2.952,-0.463 2.908,-0.469 2.866,-0.478 2.824,-0.491 2.784,-0.508 2.745,-0.528 2.709,-0.552 2.674,-0.578 2.643,-0.607 1.657,-1.593 1.657,-1.593 1.628,-1.625 1.601,-1.66 1.578,-1.697 1.558,-1.735 1.541,-1.776 1.528,-1.817 1.518,-1.86 1.513,-1.903 1.511,-1.946 1.511,-4.739 0.644,-5.606
  Bottom Layer region: 2.645,-5.606 2.645,-5.606 2.616,-5.638 2.589,-5.673 2.566,-5.71 2.546,-5.748 2.529,-5.789 2.516,-5.83 2.506,-5.873 2.501,-5.916 2.499,-5.96 2.501,-6.003 2.507,-6.047 2.516,-6.089 2.529,-6.131 2.546,-6.171 2.566,-6.21 2.59,-6.246 2.616,-6.281 2.646,-6.313 2.678,-6.342 2.713,-6.369 2.75,-6.392 2.788,-6.412 2.829,-6.429 2.87,-6.442 2.913,-6.452 2.956,-6.457 3,-6.459 3.043,-6.457 3.087,-6.451 3.129,-6.442 3.171,-6.429 3.211,-6.412 3.25,-6.392 3.286,-6.368 3.321,-6.342 3.352,-6.313 4.366,-5.3 4.366,-5.3 4.395,-5.268 4.422,-5.233 4.445,-5.196 4.465,-5.158 4.482,-5.117 4.495,-5.076 4.505,-5.033 4.51,-4.99 4.512,-4.946 4.512,-4.946 4.512,-2.153 5.352,-1.314 5.352,-1.314 5.381,-1.282 5.408,-1.247 5.431,-1.21 5.451,-1.172 5.468,-1.131 5.481,-1.09 5.491,-1.047 5.496,-1.004 5.498,-0.96 5.496,-0.917 5.49,-0.873 5.481,-0.831 5.468,-0.789 5.451,-0.749 5.431,-0.71 5.407,-0.674 5.381,-0.639 5.351,-0.607 5.319,-0.578 5.284,-0.551 5.247,-0.528 5.209,-0.508 5.168,-0.491 5.127,-0.478 5.084,-0.468 5.041,-0.463 4.997,-0.461 4.954,-0.463 4.91,-0.469 4.868,-0.478 4.826,-0.491 4.786,-0.508 4.747,-0.528 4.711,-0.552 4.676,-0.578 4.644,-0.607 3.659,-1.593 3.659,-1.593 3.629,-1.625 3.603,-1.66 3.579,-1.696 3.559,-1.735 3.542,-1.775 3.529,-1.817 3.52,-1.859 3.514,-1.903 3.512,-1.946 3.512,-4.739 2.645,-5.606
  Bottom Layer region: 4.644,-5.606 4.644,-5.606 4.615,-5.639 4.588,-5.673 4.565,-5.71 4.545,-5.749 4.528,-5.789 4.515,-5.831 4.506,-5.873 4.5,-5.916 4.498,-5.96 4.5,-6.004 4.506,-6.047 4.515,-6.089 4.528,-6.131 4.545,-6.171 4.565,-6.21 4.588,-6.247 4.615,-6.281 4.644,-6.314 4.677,-6.343 4.711,-6.37 4.748,-6.393 4.787,-6.413 4.827,-6.43 4.869,-6.443 4.911,-6.452 4.954,-6.458 4.998,-6.46 5.042,-6.458 5.085,-6.452 5.127,-6.443 5.169,-6.43 5.209,-6.413 5.248,-6.393 5.285,-6.37 5.319,-6.343 5.352,-6.314 5.352,-6.313 6.365,-5.3 6.365,-5.3 6.394,-5.268 6.421,-5.233 6.444,-5.196 6.464,-5.158 6.481,-5.117 6.494,-5.076 6.504,-5.033 6.509,-4.99 6.511,-4.946 6.511,-4.946 6.511,-2.153 7.35,-1.314 7.35,-1.314 7.38,-1.282 7.406,-1.247 7.43,-1.211 7.45,-1.172 7.467,-1.132 7.48,-1.09 7.489,-1.048 7.495,-1.004 7.497,-0.961 7.495,-0.917 7.49,-0.874 7.48,-0.831 7.467,-0.79 7.45,-0.749 7.43,-0.711 7.407,-0.674 7.38,-0.639 7.351,-0.607 7.319,-0.577 7.284,-0.551 7.248,-0.527 7.209,-0.507 7.169,-0.49 7.127,-0.477 7.085,-0.468 7.041,-0.462 6.998,-0.46 6.954,-0.462 6.911,-0.467 6.868,-0.477 6.827,-0.49 6.786,-0.507 6.748,-0.527 6.711,-0.55 6.676,-0.577 6.644,-0.606 6.643,-0.607 5.658,-1.593 5.658,-1.593 5.628,-1.625 5.602,-1.66 5.578,-1.696 5.558,-1.735 5.541,-1.775 5.528,-1.817 5.519,-1.859 5.513,-1.903 5.511,-1.946 5.511,-4.739 4.644,-5.606
  Bottom Layer region: 6.646,-5.606 6.646,-5.606 6.616,-5.638 6.59,-5.673 6.566,-5.709 6.546,-5.748 6.529,-5.788 6.516,-5.83 6.507,-5.872 6.501,-5.916 6.499,-5.959 6.501,-6.003 6.506,-6.046 6.516,-6.089 6.529,-6.13 6.546,-6.171 6.566,-6.209 6.589,-6.246 6.616,-6.281 6.645,-6.313 6.677,-6.343 6.712,-6.369 6.748,-6.393 6.787,-6.413 6.827,-6.43 6.869,-6.443 6.911,-6.452 6.955,-6.458 6.998,-6.46 7.042,-6.458 7.085,-6.453 7.128,-6.443 7.169,-6.43 7.21,-6.413 7.248,-6.393 7.285,-6.37 7.32,-6.343 7.352,-6.314 7.353,-6.313 8.366,-5.3 8.366,-5.3 8.396,-5.268 8.422,-5.233 8.446,-5.197 8.466,-5.158 8.483,-5.118 8.496,-5.076 8.505,-5.034 8.511,-4.99 8.513,-4.947 8.513,-4.946 8.513,-2.153 9.352,-1.314 9.352,-1.314 9.381,-1.282 9.408,-1.247 9.431,-1.21 9.451,-1.172 9.468,-1.131 9.481,-1.09 9.491,-1.047 9.496,-1.004 9.498,-0.96 9.496,-0.917 9.49,-0.873 9.481,-0.831 9.468,-0.789 9.451,-0.749 9.431,-0.71 9.407,-0.674 9.381,-0.639 9.351,-0.607 9.319,-0.578 9.284,-0.551 9.247,-0.528 9.209,-0.508 9.168,-0.491 9.127,-0.478 9.084,-0.468 9.041,-0.463 8.997,-0.461 8.954,-0.463 8.91,-0.469 8.868,-0.478 8.826,-0.491 8.786,-0.508 8.747,-0.528 8.711,-0.552 8.676,-0.578 8.645,-0.607 7.659,-1.593 7.659,-1.593 7.63,-1.625 7.603,-1.66 7.58,-1.697 7.56,-1.735 7.543,-1.776 7.53,-1.817 7.52,-1.86 7.515,-1.903 7.513,-1.946 7.513,-4.739 6.646,-5.606
  Bottom Layer region: -9.354,-5.606 -9.354,-5.606 -9.383,-5.639 -9.41,-5.673 -9.433,-5.71 -9.453,-5.749 -9.47,-5.789 -9.483,-5.831 -9.492,-5.873 -9.498,-5.916 -9.5,-5.96 -9.498,-6.004 -9.492,-6.047 -9.483,-6.089 -9.47,-6.131 -9.453,-6.171 -9.433,-6.21 -9.41,-6.247 -9.383,-6.281 -9.354,-6.314 -9.321,-6.343 -9.287,-6.37 -9.25,-6.393 -9.211,-6.413 -9.171,-6.43 -9.129,-6.443 -9.087,-6.452 -9.044,-6.458 -9,-6.46 -8.956,-6.458 -8.913,-6.452 -8.871,-6.443 -8.829,-6.43 -8.789,-6.413 -8.75,-6.393 -8.713,-6.37 -8.679,-6.343 -8.646,-6.314 -8.646,-6.313 -7.633,-5.3 -7.633,-5.3 -7.603,-5.268 -7.577,-5.233 -7.553,-5.197 -7.533,-5.158 -7.516,-5.118 -7.503,-5.076 -7.494,-5.034 -7.488,-4.99 -7.486,-4.947 -7.486,-4.946 -7.486,-2.153 -6.647,-1.314 -6.647,-1.314 -6.618,-1.282 -6.591,-1.247 -6.568,-1.21 -6.548,-1.172 -6.531,-1.131 -6.518,-1.09 -6.508,-1.047 -6.503,-1.004 -6.501,-0.96 -6.503,-0.917 -6.509,-0.873 -6.518,-0.831 -6.531,-0.789 -6.548,-0.749 -6.568,-0.71 -6.592,-0.674 -6.618,-0.639 -6.648,-0.607 -6.68,-0.578 -6.715,-0.551 -6.752,-0.528 -6.79,-0.508 -6.831,-0.491 -6.872,-0.478 -6.915,-0.468 -6.958,-0.463 -7.002,-0.461 -7.045,-0.463 -7.089,-0.469 -7.131,-0.478 -7.173,-0.491 -7.213,-0.508 -7.252,-0.528 -7.288,-0.552 -7.323,-0.578 -7.355,-0.607 -8.34,-1.593 -8.34,-1.593 -8.369,-1.625 -8.396,-1.66 -8.419,-1.697 -8.439,-1.735 -8.456,-1.776 -8.469,-1.817 -8.479,-1.86 -8.484,-1.903 -8.486,-1.946 -8.486,-4.739 -9.354,-5.606
  silkscreen extent -9.85,-6.6 9.8,5.8
C0402 [mm]
  rrect50% 0.5x0.6 smd: 1(-0.5,0) 2(0.5,0)
  silkscreen extent -1.03,-0.55 1.03,0.55, body extent -0.5,-0.25 0.5,0.25, height 0.5
L0402 [mm]
  rrect50% 0.5x0.6 smd: 1(-0.5,0) 2(0.5,0)
  silkscreen extent -1.02,-0.55 1.03,0.55, body extent -0.5,-0.3 0.5,0.3, height 0.49
LED_0805_G [mm]
  rect 1.2x1.2 smd: 1(-1.1,0) 2(1.1,0)
  silkscreen extent -2,-1 2,1.3, body extent -1.01,-0.62 1.01,0.63, height 1.1
"pad for programming 5x2mm" [mm]
  round 1 smd paste-0.025: 1(0,4) 2(0,2) 3(0,0) 4(0,-2) 5(0,-4)
R0402 [mm]
  rrect50% 0.5x0.6 smd: 1(-0.5,-0.004) 2(0.5,-0.004)
  silkscreen extent -1.02,-0.55 1.02,0.55, body extent -0.5,-0.25 0.5,0.25, height 0.35
"RING 4MM" [mm]
  Bottom Layer lines w0.3: -26.1,0 -24.5,0
  Bottom Layer lines w1: -25.654,5.767 ccw(c0,0.009) -4.921,-25.819 ; -25.622,5.764 ccw(c-22.991,10.016) -21.647,14.832 ; -4.915,-25.85 cw(c0.009,-24.984) -4.921,-25.819 ; -4.91,-25.821 cw(c0,0.009) -4.921,-25.819 ; 4.932,-25.826 ccw(c0,0) 4.938,-25.825 ; 4.935,-25.841 ccw(c0.009,-24.984) 4.938,-25.825 ; 21.589,14.839 ccw(c22.909,10.016) 25.624,5.817 ; 25.64,5.821 cw(c0,0) 4.938,-25.825 ; -4.921,-25.819 cw(c0.009,-24.984) 4.938,-25.825
  Keep-Out Layer, Board lines w0.3: -24.793,3.225 ccw(c-23.414,10.394) -18.962,16.179 ; -24.791,3.232 ccw(c0,0.009) -7.085,-23.966 ; -19.013,16.223 cw(c0,-0.009) 19.242,15.952 ; -7.06,-23.881 cw(c0.006,-25.714) 7.098,-23.982 ; 7.094,-23.806 ccw(c-0.009,0.164) 24.841,2.9 ; 19.082,15.854 ccw(c23.7,10.2) 24.704,2.969
SMTU2477N-LF [mm]
  rrect50% 2.6x3.5 smd: 1(-16.9,0) 2(16.9,-0.2)
  silkscreen extent -15,-12.25 15,12.25, body extent -15,-12.05 15,12.25, height 11.3
SOT23-6 [mm]
  rrect50% 0.9x0.5 smd: 1(-1.35,0.95) 2(-1.35,0) 3(-1.35,-0.95) 4(1.35,-0.95) 5(1.35,0) 6(1.35,0.95)
  silkscreen extent -0.55,-1.5 0.55,1.5, body extent -1.4,-1.48 1.4,1.42, height 1.45
"Test Point 1mm"#1 [mm] "Test Point 1mm"
  rect 3x3 smd mask+0.051: 1(0,0)
"Test Point 1mm"#2 [mm] "Test Point 1mm"
  round 1 smd paste+0 mask+0.051: 1(0,0)
UFQFPN-28 [mm] "QFN, 28-Leads, Body 4.1x4.1mm, Pitch 0.5mm"
  rect 0.3x0.3 smd: 1(-2,1.5) 7(-2,-1.5) 8(-1.5,-2) 14(1.5,-2) 15(2,-1.5) 21(2,1.5) 22(1.5,2) 28(-1.5,2)
  rect 0.55x0.3 smd: 2(-1.875,1) 3(-1.875,0.5) 4(-1.875,0) 5(-1.875,-0.5) 6(-1.875,-1) 16(1.875,-1) 17(1.875,-0.5) 18(1.875,0) 19(1.875,0.5) 20(1.875,1)
  rect 0.3x0.55 smd: 9(-1,-1.875) 10(-0.5,-1.875) 11(0,-1.875) 12(0.5,-1.875) 13(1,-1.875) 23(1,1.875) 24(0.5,1.875) 25(0,1.875) 26(-0.5,1.875) 27(-1,1.875)
  silkscreen extent -2.72,-2.2 2.2,2.2, body extent -2.05,-2.05 2.05,2.05, height 0.6
VQFN28_6X6MM [mm] "28 Leads, Body 6.0x6.0mm, Pitch 0.65mm, VQFN28"
  oval 0.8x0.3 smd mask+0.05: 1(-2.95,1.95) 2(-2.95,1.3) 3(-2.95,0.65) 4(-2.95,0) 5(-2.95,-0.65) 6(-2.95,-1.3) 7(-2.95,-1.95) 15(2.95,-1.95) 16(2.95,-1.3) 17(2.95,-0.65) 18(2.95,0) 19(2.95,0.65) 20(2.95,1.3) 21(2.95,1.95)
  oval 0.3x0.8 smd mask+0.05: 8(-1.95,-2.95) 9(-1.3,-2.95) 10(-0.65,-2.95) 11(0,-2.95) 12(0.65,-2.95) 13(1.3,-2.95) 14(1.95,-2.95) 22(1.95,2.95) 23(1.3,2.95) 24(0.65,2.95) 25(0,2.95) 26(-0.65,2.95) 27(-1.3,2.95) 28(-1.95,2.95)
  rrect5% 4.6x4.6 smd paste-3.3 mask+0.05: 29(0,0)
  silkscreen extent -3.72,-3 3,3, body extent -3,-3 3,3, height 1
WCAP-ASLI_5x5.5 [mm] "Aluminium Electrolytic V-Chip SMT Capacitors, 5x5.5mm"
  rrect50% 2x1 smd: 1(-2.2,0) 2(2.2,0)
  silkscreen extent -2.75,-2.75 2.75,2.75, body extent -3,-2.65 3,2.65, height 5.5

## Part data
BQ1: "32MHz ±10ppm Crystal 12pF 40 Ohms 4-SMD (3.20mm x 2.50mm)"
C12 C13: library part "C0402, 4.7pF, C0G", "C0402, 4.7pF, C0G"
C14: library part "C0402, 1.8pF, C0G", "C0402, 1.8pF, C0G"
C19: "Aluminium Electrolytic Capacitors - SMD WCAP-ASLI 100uF 6.3V 20% SMD/SMT"
DD1: "SX1276 - Low Power Integrated UHF Transceiver with loRa Modem"
DD2: "ARM® Cortex®-M0+ STM32G0 Microcontroller IC 32-Bit 64MHz 32KB (32K x 8) FLASH 28-UFQFPN (4x4)"
DD3: "1 KEY TOUCH PAD DETECTOR IC"
HOLD1: library part SMTU2477N-LF, "Coin Cell Battery Holders FOR CR2477N, SMD"
L1: "L0402, 5.6nH"
L2: "L0402, 33nH"
L3: "L0402, 10nH"
L4: "L0402, 8.2nH"
L5: "L0402, 7.5nH"
L6: library part LQG15HN5N1S02D, "L0402, 5.1nH"
LED1 LED2: "LED, GREEN, 0805"
TS1: "touch spring 13x8.5mm"
XS1: library part "pad for programming 5x2mm", "pad for programming 5x2mm"

## Free pads (board coordinates)
  round 0 hole 3.1: 1(5.35,38.463) 1(27.909,3.016) 1(50.65,38.463)

## Via types
v1: diameter 0.6, hole 0.3, Top Layer to Bottom Layer, tented both sides, 165 vias
v2: diameter 0.8, hole 0.3, Top Layer to Bottom Layer, tented both sides, 19 vias

## Nets (pads, with @x,y where several pads share a name; then routed paths per layer and width w, separated by ;. In a path a pad name is that pad's centre, name@x,y a point inside that pad or via, vN(x,y) a via of type N, cw(c..) or ccw(c..) an arc to the next point about the centre after c; other vN are vias at no path point)
AKTIV: DD2.6 TP1.1 | length 27.3
  Top Layer w0.2: DD2.6 17.15,23.025 17.35,22.825 18.65,22.825 20.2,24.375 25.275,24.375 26.8,25.9 28.3,25.9 28.6,25.6 28.6,17.8 26.3,15.5 v1(26.3,14.7)
  Bottom Layer w0.2: TP1.1 v1(26.3,14.7)
ANT: C9.1 C14.2 L5.2 | length 2.3
  Top Layer w0.3: L5.2 C9.1 C14.2
DIO_0: DD1.8 DD2.18 | length 3.7
  Top Layer w0.2: DD2.18 16.15,27.8 16.675,28.325 18.275,28.325 18.625,28.675 DD1.8
DIO_1: DD1.9 DD2.16 | length 3.4
  Top Layer w0.2: DD2.16 17.15,27.675 17.375,27.9 18.75,27.9 19.275,28.425 DD1.9
GND: BQ1.2 BQ1.4 C1.2 C2.2 C3.1 C4.2 C5.2 C6.1 C7.1 C12.1 C13.1 C14.1 C15.2 C16.2 C17.1 C18.2 C19.1 C20.2 C21.2 DD1.15 DD1.23 DD1.26 DD1.29 DD2.4 DD3.2 HOLD1.2 L1.2 L6.1 LED1.1 LED2.1 R1.2 TP2.1 TP3.1 XS1.3 | length 6.9
  Top Layer w0.2: LED2.1 v1(8.7,22.85) ; DD1.29@19.5,30.05 DD1.29@21.45,32 ; 50.15,24.475 50.175,24.45 LED1.1@50.175,22.925
  other v1: 35.8,5.6 19.9,5.9 37.4,6.9 20.3,8 18.275,8.65 42.5,9.3 21.35,9.375 14.4,9.6 16.6,9.6 19.9,10 34.4,10 24,10.1 39.1,10.8 15.5,10.9 12.6,11 21.4,11.3 13.725,12.25 15.1,12.4 10.875,12.45 32.2,12.5 12.1,12.9 9.7,13.6 46.6,13.7 23.3,14 29.7,14.7 42.4,15 33.2,15.8 11.175,15.925 15.1,15.975 38.7,16 6.775,16.575 17.4,17 45.1,17.3 13,17.5 29.7,17.5 7.3,17.6 20.55,18.2 22,18.2 23.175,18.2 24.4,18.2 8.05,18.35 19.2,18.4 25.6,18.4 12.775,19.525 35.4,19.8 31.425,20.15 27,20.5 33.9,20.6 29.825,21.2 21.925,21.225 16.15,21.275 17.8,21.275 19.425,21.275 36.1,21.3 27,21.6 24.425,22.2 31.4,22.3 42.2,22.3 20.275,22.65 27,22.9 39.4,23 47.1,23.4 48.9,24.1 4.1,24.3 27,24.3 51.3,24.3 34,24.4 11.425,25.5 15.825,25.775 30.1,25.9 42.2,26 37.1,26.2 4.85,26.4 7,26.425 33.2,26.7 35.7,26.8 19.15,27.375 20.4,27.375 30.1,27.8 23.55,28.25 14.1,28.3 45.55,28.425 40.6,28.5 36.2,29 23.55,29.225 16.05,29.25 30.2,29.3 32.3,29.4 6.9,29.5 4,29.9 18.7,30.025 19.925,30.025 21.875,30.025 7.7,30.3 35.6,30.7 30.2,30.8 19.3,30.825 21.025,30.85 11.95,30.95 32.3,31.1 8.425,31.275 39.2,31.5 44.8,31.6 29.5,31.7 18.75,31.925 19.925,31.925 21.875,31.925 28.8,32.4 29.8,32.9 43.8,32.9 14.5,32.975 35.9,33 19.275,33.025 21.025,33.05 22.5,33.05 33.9,33.2 25.8,33.3 27.1,33.3 30.7,33.7 21.875,33.9 18.65,33.95 19.9,33.95 33.1,34.1 35.2,34.1 37.3,34.1 41.3,34.1 13.9,34.375 30.1,34.7 32.2,34.7 34.1,34.7 36.2,34.8 38.2,34.8 29,35.7 30,35.7 32.2,35.7 34.1,35.7 36.2,35.8 38.2,35.8 39.3,35.8 40.6,35.8 41.9,35.8 43.2,35.8 12.5,36 25.275,36.05 17.65,36.1 18.85,36.1
LED_PWR: DD2.27 R3.2 | length 6.2
  Top Layer w0.2: DD2.27 13.875,24.45 13.5,24.075 13.5,22.309 13.855,21.955 13.855,20.024 R3.2
LED_SENS: DD2.2 R2.2 | length 5.1
  Top Layer w0.2: DD2.2 15.15,23.175 14.525,22.55 14.525,20.579 R2.2
MISO: DD1.17 DD2.12 | length 14.7
  Top Layer w0.2: DD2.12 24.7,25.95 26.025,27.275 26.025,30.55 25.225,31.35 DD1.17
MOSI: DD1.18 DD2.13 | length 14.2
  Top Layer w0.2: DD2.13 24.5,26.45 25.325,27.275 v1(25.325,30.2) ; DD1.18 25.325,32 v1(25.35,31.975)
  Bottom Layer w0.2: v1(25.325,30.2) 25.338,30.213 25.338,31.963 v1(25.35,31.975)
NetANT1_1: ANT1.1 C10.2 | length 1
  Top Layer w0.3: C10.2 ANT1.1
  other v2: 19.301,44.961 21.301,44.961 23.301,44.961 25.301,44.961 27.301,44.961 29.301,44.961 31.301,44.961 33.301,44.961 35.301,44.961 19.301,49.96 21.301,49.96 23.301,49.96 25.301,49.96 27.301,49.96 29.301,49.96 31.301,49.96 33.301,49.96 35.301,49.96 37.3,49.96
NetBQ1_1: BQ1.1 C2.1 DD1.5 | length 7.4
  Top Layer w0.2: C2.1 12.9,32.875 BQ1.1 13.025,31.35 DD1.5
NetBQ1_3: BQ1.3 C1.1 DD1.6 | length 4.1
  Top Layer w0.2: BQ1.3 13.875,30.05 C1.1 15.9,30.7 DD1.6
NetC3_2: C3.2 DD1.4 | length 1.5
  Top Layer w0.3: C3.2 16.2,32 DD1.4
NetC5_1: C5.1 DD1.2 | length 2.3
  Top Layer w0.3: C5.1@16.225,34.825 16.75,34.3 16.75,33.85 17.3,33.3 DD1.2
NetC8_1: C8.1 DD1.21 L1.1 | length 5.5
  Top Layer w0.3: DD1.21 27.65,33.95 C8.1 L1.1
NetC8_2: C8.2 DD1.22 L2.1 L3.1 | length 6.3
  Top Layer w0.3: DD1.22 27.55,34.95 C8.2@27.7,34.8 ; C8.2 L3.1
NetC9_2: C9.2 C10.1 L6.2 | length 2.2
  Top Layer w0.3: C9.2 C10.1 L6.2@37.3,35.9
NetC11_1: C11.1 L3.2 | length 1.2
  Top Layer w0.3: L3.2 C11.1
NetC11_2: C11.2 C12.2 L4.1 | length 2.3
  Top Layer w0.3: C11.2 L4.1 C12.2
NetC13_2: C13.2 L4.2 L5.1 | length 2.3
  Top Layer w0.3: L4.2 L5.1 C13.2
NetLED1_2: LED1.2 R2.1 | length 35.6
  Top Layer w0.2: R2.1 16.754,19.2 26.2,19.2 v1(26.5,18.9) ; v1(29.5,18.9) 45.8,18.9 47.625,20.725 LED1.2@50.175,20.725
  Bottom Layer w0.2: v1(26.5,18.9) v1(29.5,18.9)
NetLED2_2: LED2.2 R3.1 | length 9.8
  Top Layer w0.2: v1(10.525,19.15) 11.4,18.275 R3.1
  Top Layer w0.3: LED2.2 6.075,20.6 7.525,19.15 8.75,19.15 v1(8.775,19.175) ; v1@8.8,19.175 8.85,19.175 8.9,19.125 8.875,19.1 v1@8.8,19.175
  Bottom Layer w0.3: v1(8.775,19.175) 10.5,19.175 v1(10.525,19.15)
NSS: DD1.19 DD2.10 | length 18.5
  Top Layer w0.2: DD2.10 25.125,24.95 27.3,27.125 27.3,31.05 25.7,32.65 DD1.19
OUT_TOUCH: DD2.25 DD3.1 | length 8.4
  Top Layer w0.2: DD3.1 6.85,27.575 v1(8.725,27.575) ; v1(10.1,27.575) 11.801,27.575 13.926,25.45 DD2.25
  Bottom Layer w0.2: v1(8.725,27.575) v1(10.1,27.575)
RESET: C20.1 DD2.5 XS1.5 | length 8.5
  Top Layer w0.2: XS1.5 11.075,22.525 12.2,23.65 v1(12.25,23.65) 12.25,24.475 C20.1 ; DD2.5 v1(16.65,24.5)
  Bottom Layer w0.2: v1(12.25,23.65) 13.1,24.5 v1(16.65,24.5)
RESET_SX: DD1.7 DD2.19 | length 3.7
  Top Layer w0.2: DD2.19 15.65,27.9 16.475,28.725 17.1,28.725 17.625,29.25 17.625,29.875
SCK: DD1.16 DD2.11 | length 15.7
  Top Layer w0.2: DD2.11 24.875,25.45 26.7,27.275 v1(26.7,28.775) ; DD1.16 24.05,30.7 24.475,30.275 v1(24.475,28.95)
  Bottom Layer w0.2: v1(24.475,28.95) 26.417,28.95 26.592,28.775 v1(26.7,28.775)
SWCLK: DD2.21 R1.1 XS1.2 | length 4.3
  Top Layer w0.2: XS1.2 11.85,28.525 12.925,27.45 DD2.21
SWDIO: DD2.20 XS1.1 | length 7.1
  Top Layer w0.2: XS1.1 10.75,30.15 11.775,29.125 14.475,29.125 15.15,28.45 15.15,27.766 ; 15.15,27.766 DD2.20 15.2,27.375 15.2,27.716 15.15,27.766
TOUCH: C17.2 DD3.3 | length 2.6
  Top Layer w0.3: v1(3.6,28.1) 4.875,28.1 ; DD3.3 4.875,28.1 ; C17.2 4.875,28.8 4.875,28.1
USART1_TX: DD2.26 TP4.1 | length 4.2
  Top Layer w0.2: TP4.1 12.875,24.275 13.55,24.95 DD2.26
VBAT: C4.1 C15.1 C16.1 C18.1 C19.2 C21.1 DD1.3 DD1.14 DD1.24 DD2.3 DD3.5 HOLD1.1 XS1.4 | length 96.7
  Top Layer w0.2: 18.325,37.2 20.15,37.2 C18.1 21.225,36.125 DD1.24 ; DD1.14 22.525,28.3 C15.1 22.525,27.45 v1(24.5,27.45)
  Top Layer w0.3: DD3.5 DD3.5@5.825,24.972 ; DD3.5@5.825,25.05 DD3.5@5.825,24.972 ; XS1.4 9.7,25.575 9.45,25.575 ; DD2.3 15.65,22.65 C21.1 15.15,21.175 16.625,19.7 28,19.7 ; DD1.3 17,32.65 C4.1 13.662,35.987 13.662,36.012 ; 18.325,37.2 14.85,37.2 13.662,36.012 ; DD3.5@5.825,24.972 6.453,25.6 8.15,25.6 C16.1 9.45,25.575 ; 9.45,25.575 9.375,25.65 9.375,31.725 13.662,36.012
  Top Layer w0.5: C19.2@9.225,15.975 C19.2@9.2,15.975 ; XS1.4 9.625,23.4 9.625,16.95 C19.2 C19.2@9.2,15.975 ; HOLD1.1@17.483,13.808 17.483,15.008 19.625,17.15 26.85,17.15 28,18.3 28,19.7 v1(28,25.2) ; HOLD1.1@17.483,14.058 11.117,14.058 C19.2@9.2,15.975
  Bottom Layer w0.5: v1(24.5,27.45) 25.75,27.45 v1(28,25.2)
VR_PA: C6.2 C7.2 DD1.25 L2.2 | length 8
  Top Layer w0.2: v1(21.825,36.075) 21.825,36.55 22.375,37.1 C6.2@23.225,37.1 ; C6.2 C7.2 25.325,37.075 L2.2@26.3,36.1 ; L2.2@26.2,36.1 L2.2@26.3,36.1 ; L2.2@26.35,35.95 L2.2@26.4,35.9 ; L2.2 L2.2@26.3,36.1
  Top Layer w0.3: DD1.25 20.575,35.7 v1(20.6,35.725)
  Bottom Layer w0.5: v1(20.6,35.725) 21.475,35.725 v1(21.825,36.075)
pads on no net: DD1.1 DD1.10 DD1.11 DD1.12 DD1.13 DD1.20 DD1.27 DD1.28 DD2.1 DD2.7 DD2.8 DD2.9 DD2.14 DD2.15 DD2.17 DD2.22 DD2.23 DD2.24 DD2.28 DD3.4 DD3.6

## Polygon pours and split planes (outlines as drawn)
GND on Top Layer "Bottom Layer-BAT" (solid, remove dead copper, pour order 14): 1.2,34.7 5.7,37.7 54,37.696 54,7 54,4 0.7,4
GND on Bottom Layer "Bottom Layer-BAT" (solid, remove dead copper, pour order 16): -0.05,37.25 0.2,37.5 23.9,37.5 54,37.5 54,7 54,4 0.7,4

## Keep-outs
Keep-Out Layer, Board:
  circle w0.8: c28,28 r28

## Other copper
Top Layer:
  pour cut-out: 6.15,19.506 cw(c6.15,21.726) 3.93,21.726 cw(c6.15,21.726) 6.15,23.947 cw(c6.15,21.726) 8.371,21.726 cw(c6.15,21.726)
  pour cut-out: 50.275,19.456 cw(c50.275,21.676) 48.055,21.676 cw(c50.275,21.676) 50.275,23.897 cw(c50.275,21.676) 52.496,21.676 cw(c50.275,21.676)
  pour cut-out: 44.4,38.741 44.4,36.2 35.563,36.2 28,36.2 27.1,35.3 25.6,35.3 25.6,36.367 25.067,36.9 11.7,36.9 11.8,37.7 11.9,37.8 11.9,38
  pour cut-out: 23.6,34.95 23.793,34.757 23.793,33.95 28.25,33.95 28.3,33.9 28.3,35.4 23.829,35.4 23.736,35.307
Bottom Layer:
  pour cut-out: 6.152,19.49 cw(c6.152,21.71) 3.932,21.71 cw(c6.152,21.71) 6.152,23.93 cw(c6.152,21.71) 8.373,21.71 cw(c6.152,21.71)
  pour cut-out: 6.152,19.49 cw(c6.152,21.71) 3.932,21.71 cw(c6.152,21.71) 6.152,23.93 cw(c6.152,21.71) 8.373,21.71 cw(c6.152,21.71)
  pour cut-out: 50.231,19.5 cw(c50.231,21.72) 48.011,21.72 cw(c50.231,21.72) 50.231,23.941 cw(c50.231,21.72) 52.452,21.72 cw(c50.231,21.72)

## Silkscreen, mask and mechanical layers (free items; w line width, h text height)
Top Overlay, Top Silk:
  lines w0.2: 12.025,7.9 44.025,7.9 ; 12.025,7.943 ccw(c10.025,7.943) 11.361,9.431 cw(c28.025,28) 3.196,30.454 ccw(c5.375,38.463) 12.025,33.497 12.025,41.8 cw(c22.025,41.8) 22.025,51.8 34.025,51.8 cw(c34.025,41.8) 44.025,41.8 44.025,33.497 ccw(c50.675,38.463) 52.854,30.454 cw(c28.025,28) 44.689,9.431 ccw(c46.025,7.943) 44.025,7.943
  lines w0.3: 7.525,38.425 7.525,32.75 9.575,30.7 9.575,24.4 ; 9.75,19.625 9.75,23.5 11.85,23.5 11.85,19.625 9.75,19.625
  text "DIO" at 8.025,37.475 h1.5
  text "CLK" at 7.975,35.925 h1.5
  text "GND" at 8.05,34.4 h1.5
  text "BAT" at 8.1,33.075 h1.5
  text "TX" at 12.125,20.025 h1.5
  text "RESET" at 9.4,19.675 h1.5 r90
Bottom Overlay, Bot Silk:
  lines w0.3: 24.2,10.7 24.2,14.7 31.6,14.7 31.6,10.7 24.2,10.7
  text "POWER" at 53.025,24.275 h2
  text "SENS" at 8.625,24.075 h2
Top Solder, Top Mask:
  circle w3: c6.15,21.725 r0.7
  circle w3: c50.25,21.75 r0.7
Bottom Solder 1:
  circle w3: c6.125,21.7 r0.7
  circle w3: c50.275,21.75 r0.7
Mechanical 1:
  circle w0.2: c12,7.9 r0.025
  circle w0.2: c12,8.856 r0.025
  circle w0.2: c44,7.9 r0.025
  circle w0.2: c44,8.856 r0.025
  circle w0.2: c12,41.8 r0.025
  circle w0.2: c12,33.497 r0.025
  circle w0.2: c28,28 r28.45
  circle w0.2: c28,28 r24.95
  circle w0.2: c44,41.8 r0.025
  circle w0.2: c44,33.497 r0.025
  circle w0.2: c22,51.8 r0.025
  circle w0.2: c12,41.8 r0.025
  circle w0.2: c3.171,30.454 r0.025
  circle w0.2: c12,33.497 r0.025
  circle w0.2: c44,41.8 r0.025
  circle w0.2: c34,51.8 r0.025
  circle w0.2: c44,33.497 r0.025
  circle w0.2: c52.829,30.454 r0.025
  circle w0.2: c3.171,30.454 r0.038
  circle w0.2: c12,8.856 r0.038
  circle w0.2: c44,8.856 r0.025
  circle w0.2: c52.829,30.454 r0.025
  circle w0.2: c12,7.9 r0.025
  circle w0.2: c44,7.9 r0.025
  circle w0.2: c22,51.8 r0.025
  circle w0.2: c34,51.8 r0.025
  circle w0.2: c5.35,38.463 r1.25
  circle w0.2: c50.65,38.463 r1.25
  circle w0.2: c28,3.05 r1.25
  circle w0.2: c28,28 r28
  lines w0.2: 5.35,38.463 50.65,38.463 ; 28,28 28,57.65 ; 3.171,30.454 ccw(c5.35,38.463) 12,33.497 12,41.8 cw(c22,41.8) 22,51.8 34,51.8 cw(c34,41.8) 44,41.8 44,33.497 ccw(c50.65,38.463) 52.829,30.454 cw(c28,28) 44.664,9.431 ccw(c46,7.943) 44,7.943 44,7.9 12,7.9 12,7.943 ccw(c10,7.943) 11.336,9.431 cw(c28,28) 3.171,30.454
Mechanical 4:
  circle w0.5: c28,28 r28

## Text inside footprints (layer, text, board x,y; h text height)
C19: Top Overlay, Top Silk "+" at 10.35,18.275 h1.22 r180